# Altium PCB Mid.PcbDoc
Units mm, origin at the board's own origin, x right, y up, seen from the top; angles counter-clockwise.
Board outline 37.6 x 34.04 mm, 2 copper layers (Top Layer, Bottom Layer); 26 components, 26 nets, 103 pads, 18 vias.
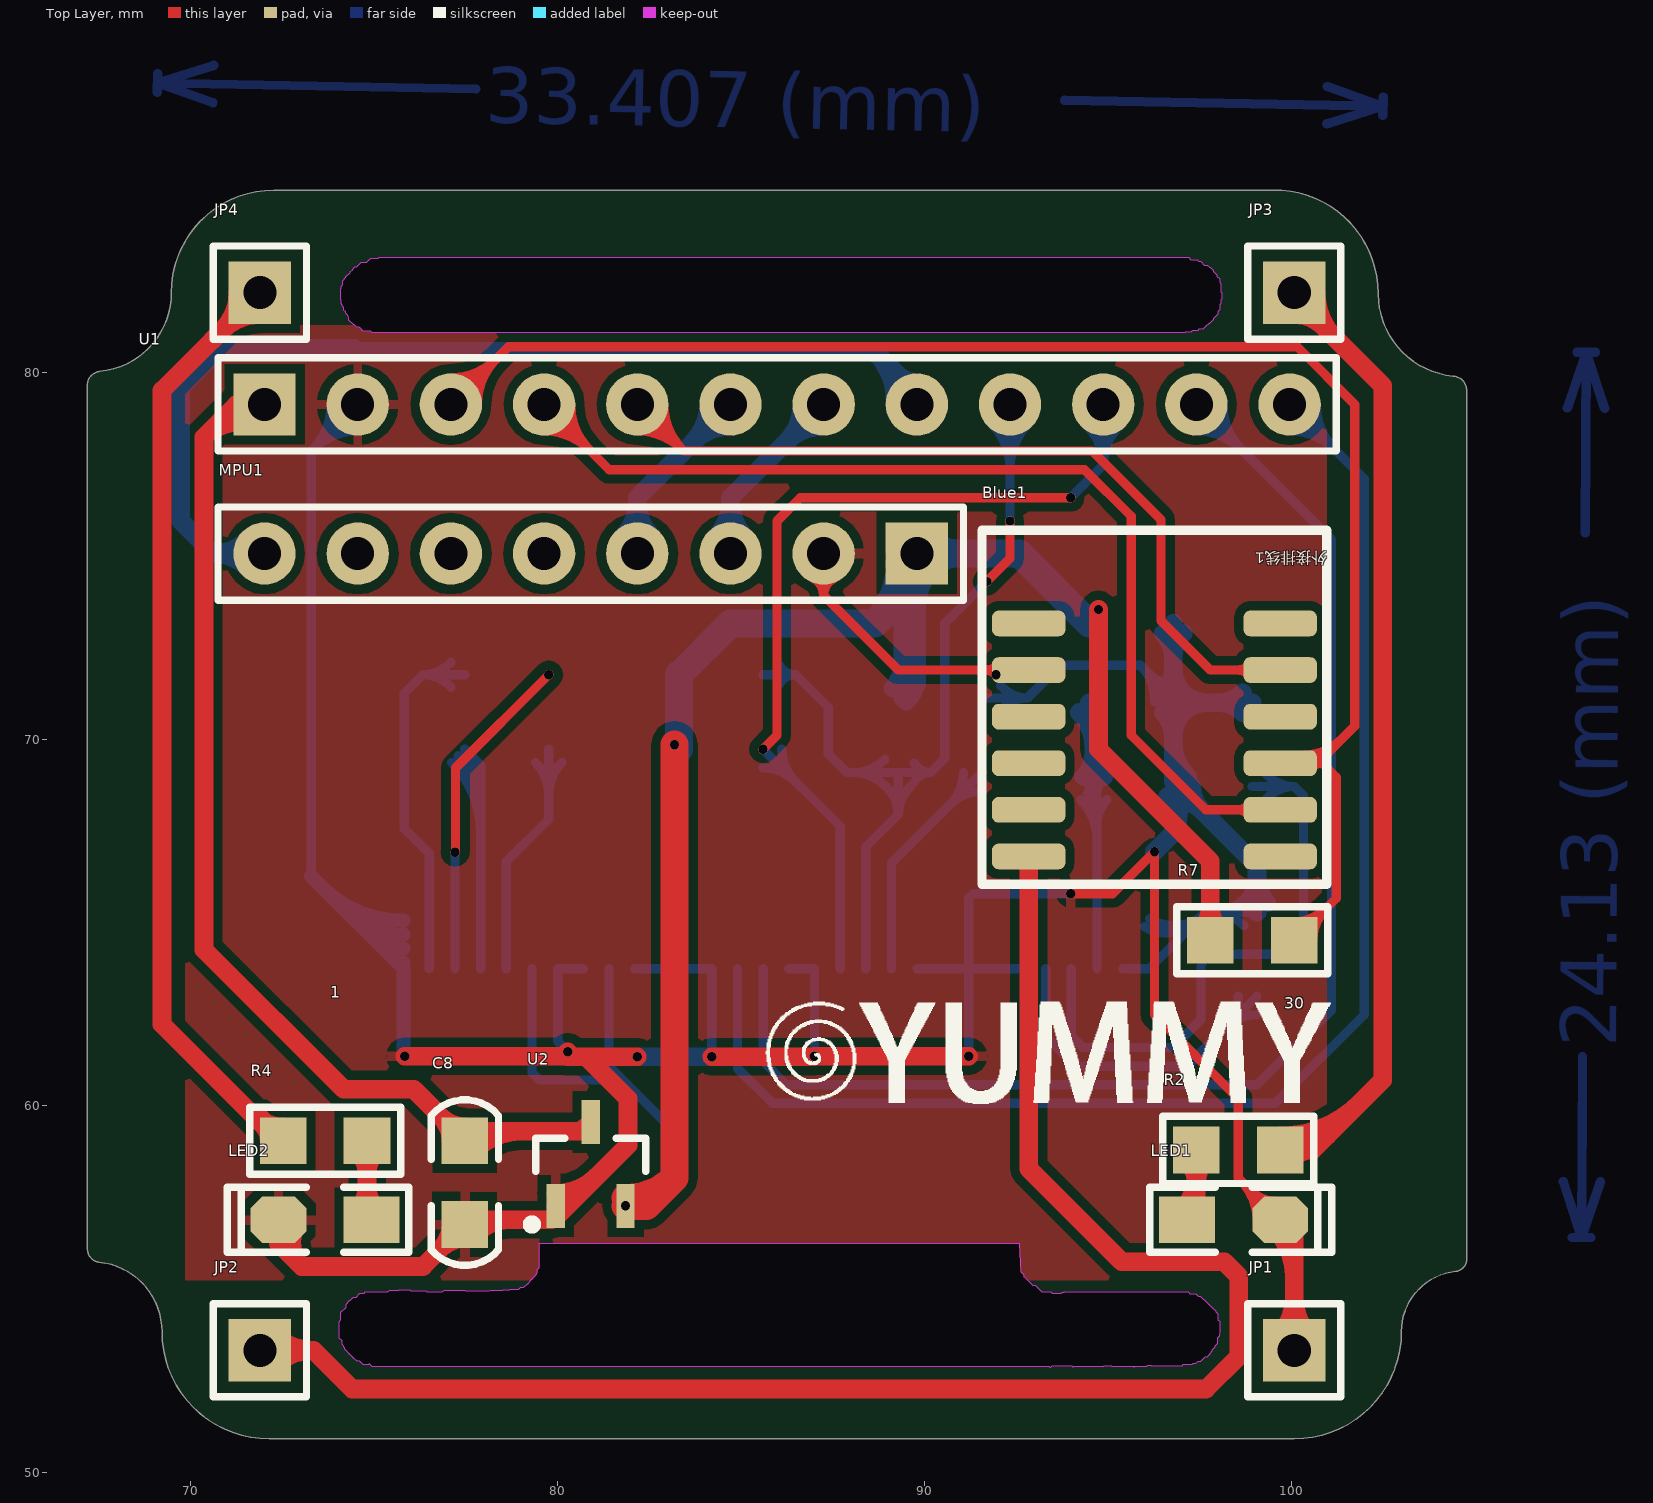
[diagram p0: Top Layer view]
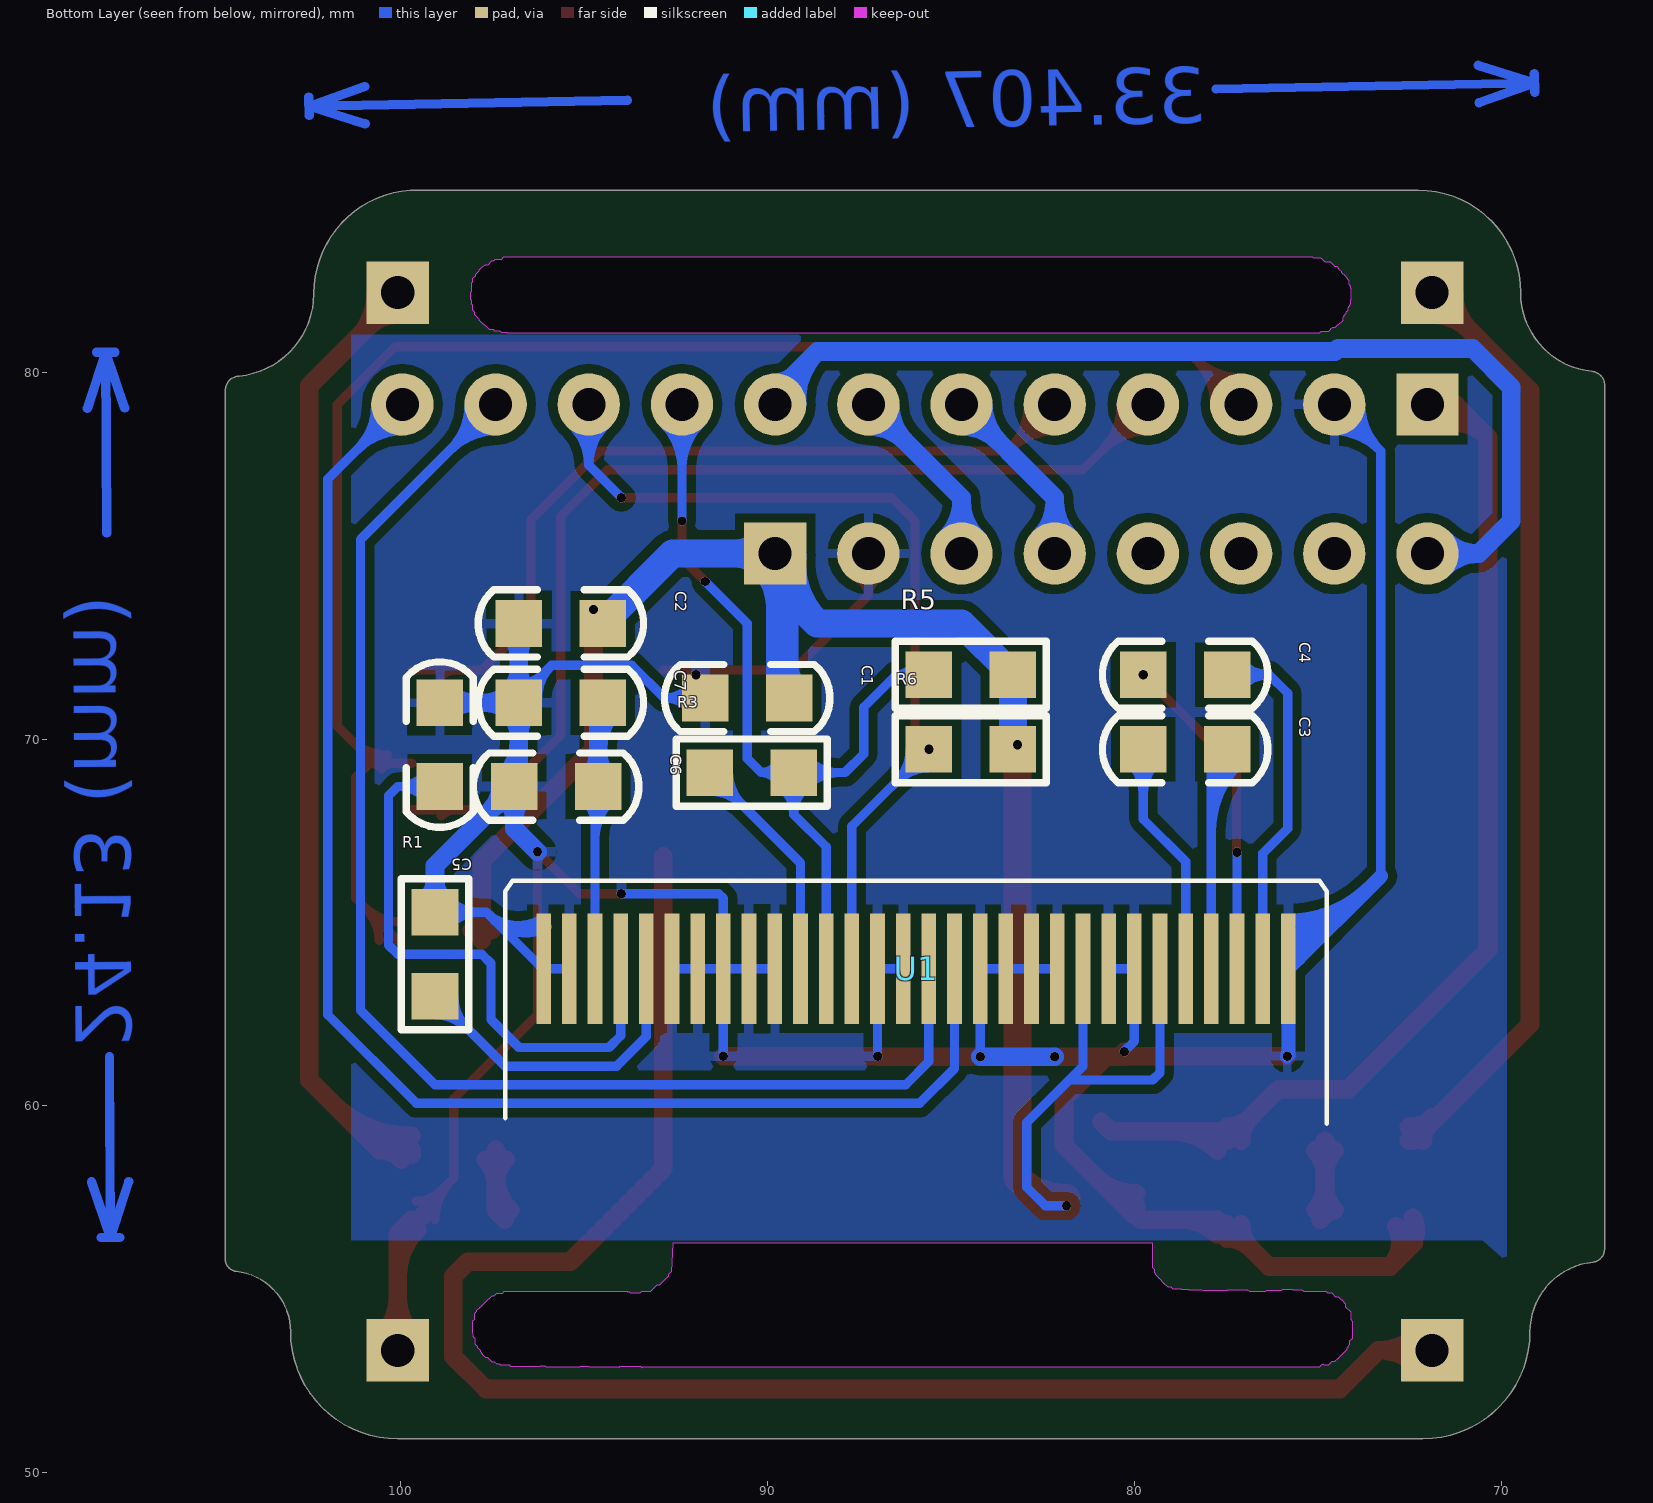
[diagram p1: Bottom Layer view, seen from below]

## Layer stack, top to bottom
Top Solder: solder mask 0.0102, Solder Resist, Dk 3.5
Top Layer: signal copper 0.0356
Dielectric 1: dielectric 0.32, FR-4, Dk 4.8
Bottom Layer: signal copper 0.0356
Bottom Solder: solder mask 0.0102, Solder Resist, Dk 3.5

## Board outline
69.215,53.848 cw(c69.342,53.848) 69.215,53.849 ccw(c67.31,53.848) 67.498,55.743 cw(c67.509,55.87) 67.492,55.744 cw(c67.541,56.102) 67.183,56.142 67.183,79.624 cw(c67.555,79.649) 67.523,80.021 ccw(c67.31,82.169) 69.469,82.169 cw(c72.263,82.169) 72.263,84.963 99.695,84.963 cw(c99.695,84.836) 99.734,84.957 cw(c99.547,82.148) 102.362,82.148 cw(c99.547,82.148) 102.362,82.127 ccw(c104.627,82.148) 104.4,79.895 cw(c104.388,79.507) 104.775,79.507 cw(c104.388,79.507) 104.775,79.501 cw(c104.388,79.507) 104.775,79.5 104.775,79.502 104.775,55.891 cw(c104.43,55.836) 104.78,55.836 cw(c104.43,55.836) 104.499,55.493 cw(c104.474,55.617) 104.484,55.49 cw(c104.648,53.848) 104.486,55.491 104.484,55.49 ccw(c104.648,53.848) 102.997,53.848 cw(c100.076,53.848) 100.076,50.927 72.136,50.927 cw(c72.136,51.054) 72.134,50.927 ccw(c72.136,53.848) 72.136,50.927 72.134,50.927 cw(c72.136,53.848)
cut-out: 79.502,56.261 92.583,56.261 92.617,55.484 92.701,55.4 92.701,55.35 92.721,55.35 92.951,55.12 93.011,55.12 93.191,54.94 93.441,54.94 93.481,54.9 93.731,54.9 93.751,54.92 93.801,54.92 93.811,54.93 97.181,54.93 97.231,54.88 97.391,54.88 97.461,54.81 97.511,54.81 97.591,54.73 97.611,54.73 97.841,54.5 97.861,54.5 97.861,54.49 97.931,54.42 97.931,54.39 97.991,54.33 97.991,54.18 98.041,54.13 98.041,53.95 98.051,53.94 98.051,53.8 98.031,53.78 98.031,53.72 97.981,53.67 97.981,53.52 97.911,53.45 97.911,53.42 97.831,53.34 97.831,53.31 97.771,53.25 97.771,53.23 97.691,53.15 97.631,53.15 97.511,53.03 97.441,53.03 97.381,52.97 97.311,52.97 97.281,52.94 97.041,52.94 97.011,52.91 96.191,52.91 96.181,52.92 96.071,52.92 96.041,52.89 95.731,52.89 95.721,52.88 95.711,52.89 95.111,52.89 95.101,52.9 94.881,52.9 94.871,52.89 94.051,52.89 94.041,52.88 94.021,52.9 93.461,52.9 93.431,52.87 93.411,52.89 74.941,52.89 74.861,52.97 74.841,52.95 74.701,52.95 74.611,53.04 74.531,53.04 74.441,53.13 74.421,53.13 74.421,53.14 74.331,53.23 74.321,53.23 74.321,53.24 74.191,53.37 74.191,53.41 74.171,53.43 74.171,53.45 74.121,53.5 74.121,53.6 74.051,53.67 74.051,53.82 74.041,53.83 74.041,54.12 74.091,54.17 74.091,54.38 74.231,54.52 74.231,54.6 74.321,54.69 74.321,54.71 74.351,54.71 74.431,54.79 74.511,54.79 74.611,54.89 74.721,54.89 74.761,54.93 75.371,54.93 75.421,54.98 75.671,54.98 75.681,54.99 75.971,54.99 76.001,54.96 76.401,54.96 76.431,54.93 76.851,54.93 76.901,54.98 77.461,54.98 77.481,54.96 78.141,54.96 78.161,54.98 78.501,54.98 78.511,54.99 78.691,54.99 78.711,55.01 78.941,55.01 78.991,55.06 79.081,55.06 79.181,55.16 79.191,55.16 79.191,55.17 79.311,55.29 79.321,55.29 79.321,55.31 79.411,55.4 79.411,55.43 79.441,55.46 79.441,55.53 79.501,55.59 79.501,55.66
cut-out: 74.139,82.492 74.229,82.582 74.229,82.612 74.239,82.612 74.339,82.712 74.349,82.712 74.349,82.732 74.409,82.792 74.409,82.812 74.469,82.872 74.519,82.872 74.649,83.002 74.799,83.002 74.899,83.102 75.109,83.102 75.139,83.132 97.199,83.132 97.259,83.072 97.429,83.072 97.479,83.022 97.529,83.022 97.629,82.922 97.709,82.922 97.769,82.862 97.789,82.862 97.869,82.782 97.869,82.752 97.959,82.662 97.959,82.622 98.039,82.542 98.039,82.452 98.069,82.422 98.069,82.292 98.079,82.282 98.079,82.192 98.099,82.172 98.099,81.992 98.079,81.972 98.079,81.872 98.049,81.842 98.049,81.702 97.989,81.642 97.989,81.582 97.869,81.462 97.869,81.432 97.759,81.322 97.739,81.322 97.669,81.252 97.659,81.252 97.579,81.172 97.479,81.172 97.439,81.132 97.289,81.132 97.249,81.092 97.109,81.092 97.089,81.072 74.949,81.072 74.909,81.112 74.699,81.112 74.639,81.172 74.639,81.182 74.589,81.232 74.519,81.232 74.459,81.292 74.439,81.292 74.309,81.422 74.309,81.502 74.289,81.522 74.279,81.522 74.279,81.552 74.219,81.612 74.219,81.642 74.169,81.692 74.169,81.762 74.139,81.792 74.139,81.802 74.129,81.812 74.129,81.832 74.099,81.862 74.099,81.972 74.089,81.982 74.089,82.272 74.099,82.282 74.099,82.342 74.139,82.382

## Design rules (kind name [scope] priority, off if disabled: settings)
Clearance [All] p1: gap=0.254
PolygonConnect [All] p1: connectstyle=Relief reliefconductorwidth=0.254 reliefentries=4 polygonreliefangle="90 Angle" airgapwidth=0.254
RoutingVias [All] p1: holewidth=0.711 width=1.27 viastyle="Through Hole" minholewidth=0.711 minwidth=1.27 maxholewidth=0.711 maxwidth=1.27
SolderMaskExpansion [All] p1: expansion=0.102
Width [All] p1: maxlimit=2.54 minlimit=0.254 preferedwidth=1.27
29 further rules are at their usual default settings.

## Classes and differential pairs
component class Sheet1: Blue1 C1 C2 C3 C4 C5 C6 JP1 JP2 JP3 JP4 LED1 LED2 MPU1 R1 R2 R4 R5 R6 U1 U2 外接排线1

## Components (designator, comment, footprint, x,y, rotation, side; value= is the part's Value field where it differs from the comment)
Blue1 "蓝牙5.0模块" PW02 92.837,71.882 r0 top
C1 "105" "C 0805" 90.551,71.12 r180 bottom
C2 "225" "C 0805" 95.631,73.152 r180 bottom
C3 "105" "C 0805" 78.613,69.723 r180 bottom
C4 "105" "C 0805" 78.613,71.755 r180 bottom
C5 "225" "C 0805" 98.933,69.85 r270 bottom
C6 "225" "C 0805" 95.758,68.707 r180 bottom
C7 "105" "C 0805" 95.631,70.993 r180 bottom
C8 "105" "C 0805" 77.47,57.912 r270 top
JP1 "HDR-1X1" HDR-1X1 100.076,53.34 r0 top
JP2 "HDR-1X1" HDR-1X1 71.882,53.34 r0 top
JP3 "HDR-1X1" HDR-1X1 100.076,82.169 r0 top
JP4 "HDR-1X1" HDR-1X1 71.882,82.169 r0 top
LED1 "红色" "LED 0805B" 98.425,56.896 r0 top
LED2 "红色" "LED 0805G" 73.66,56.896 r180 top
MPU1 "HDR-1X8" HDR-1X8 89.789,75.057 r180 top
R1 "560K" "R 0805" 99.06,64.135 r270 bottom
R2 "1K" "R 0805" 98.552,58.801 r0 top
R3 "0R" "R 0805" 90.424,69.088 r0 bottom
R4 "1K" "R 0805" 73.66,59.055 r180 top
R5 "4.7K" "R 0805" 84.455,71.755 r180 bottom
R6 "4.7K" "R 0805" 84.455,69.723 r180 bottom
R7 "10K" "R 0805" 98.933,64.516 r180 top
U1 "1.3寸OLED，PFC线30pin" 1.3寸OLED-PFC 85.852,61.087 r0 top
U2 "XC6206" SOT23-3N 80.899,58.42 r0 top
外接排线1 "HDR-1X12" HDR-1X12 72.009,79.121 r0 top

## Footprints (in the part's own frame and the unit in brackets; to place one, negate y for a bottom-side part, rotate by r counter-clockwise, add the part's x,y. Pads: shape width x height; smd on the part's side, far side on the other; paste and mask are expansions set on the pad)
1.3寸OLED-PFC [mm] "用于OLED的30针脚"
  rect 0.4x3 smd far side: 1(-10.052,2.654) 2(-9.352,2.654) 3(-8.652,2.654) 4(-7.952,2.654) 5(-7.252,2.654) 6(-6.552,2.654) 7(-5.852,2.654) 8(-5.152,2.654) 9(-4.452,2.654) 10(-3.752,2.654) 11(-3.052,2.654) 12(-2.352,2.654) 13(-1.652,2.654) 14(-0.952,2.654) 15(-0.252,2.654) 16(0.448,2.654) 17(1.148,2.654) 18(1.848,2.654) 19(2.548,2.654) 20(3.248,2.654) 21(3.948,2.654) 22(4.648,2.654) 23(5.348,2.654) 24(6.048,2.654) 25(6.748,2.654) 26(7.448,2.654) 27(8.148,2.654) 28(8.848,2.654) 29(9.548,2.654) 30(10.248,2.654)
  body extent -17.4,-4.95 17.6,18.91, height 2.44
"C 0805" [mil] "无极性贴片电容"
  rect 50x50 smd: 1(-45,0) 2(45,0)
  silkscreen extent -89,-36 89,36, body extent -39,-24 39,24, height 20
HDR-1X1 [mm] "排针，1脚"
  rect 1.7x1.7 hole 0.9: 1(0,0)
  silkscreen extent -1.27,-1.27 1.27,1.27, body extent -1.27,-1.27 1.27,1.27, height 8.5
HDR-1X8 [mm] "排针，8脚"
  rect 1.7x1.7 hole 0.9: 1(0,0)
  round 1.7 hole 0.9: 2(2.54,0) 3(5.08,0) 4(7.62,0) 5(10.16,0) 6(12.7,0) 7(15.24,0) 8(17.78,0)
  silkscreen extent -1.27,-1.27 19.05,1.27, body extent -1.27,-1.27 19.05,1.27, height 8.5
HDR-1X12 [mm] "排针，13脚"
  rect 1.7x1.7 hole 0.9: 1(0,0)
  round 1.7 hole 0.9: 2(2.54,0) 3(5.08,0) 4(7.62,0) 5(10.16,0) 6(12.7,0) 7(15.24,0) 8(17.78,0) 9(20.32,0) 10(22.86,0) 11(25.4,0) 12(27.94,0)
  silkscreen extent -1.27,-1.27 29.21,1.27, body extent -1.27,-1.27 29.21,1.27, height 8.5
"LED 0805B" [mil] "蓝色0805LED"
  rect 60x50 smd: 1(-50,0)
  oct 60x50 smd: 2(50,0)
  silkscreen extent -90,-35 105,35, body extent -39,-25 39,25, height 32
"LED 0805G" [mil] "绿色0805LED"
  rect 60x50 smd: 1(-50,0)
  oct 60x50 smd: 2(50,0)
  silkscreen extent -90,-35 105,35, body extent -39,-25 39,25, height 32
PW02 [mm] "蓝牙5.0模块"
  rrect50% 2x0.7 / inner round 0 / far side round 0 all layers, no hole: 1(0,1.27) 2(0,0) 3(0,-1.27) 4(0,-2.54) 5(0,-3.81) 6(0,-5.08) 7(6.858,-5.08) 8(6.858,-3.81) 9(6.858,-2.54) 10(6.858,-1.27) 11(6.858,0) 12(6.858,1.27)
  silkscreen extent -1.27,-5.84 8.13,3.81
"R 0805" [mil] "1/8W贴片电阻"
  rect 50x50 smd: 1(-45,0) 2(45,0)
  silkscreen extent -81,-36 81,36, body extent -39,-25 39,25, height 20
SOT23-3N [mm] "3x1.3x1mm(长宽高)"
  rect 0.5x1.2 smd: 1(-0.95,-1.143) 2(0.95,-1.143) 3(0,1.143)
  silkscreen extent -1.72,-1.78 1.5,0.7, body extent -1.5,-1.2 1.5,1.2, height 1.05

## Part data
Blue1: library part PW02
C1 C2 C3 C4 C5 C6 C7 C8: library part C, "无极性贴片电容"
JP1 JP2 JP3 JP4: library part "Header 1", "1P接插件"
LED1 LED2: library part LED-SMD, "贴片LED"
MPU1: library part "Header 8", "8P接插件"
R1 R2 R3 R4 R5 R6 R7: library part R, "贴片电阻"
U2: "稳压芯片"
外接排线1: library part "Header 12", "12P接插件"

## Via types
v1: diameter 0.254, hole 0.254, Top Layer to Bottom Layer, 18 vias

## Nets (pads, with @x,y where several pads share a name; then routed paths per layer and width w, separated by ;. In a path a pad name is that pad's centre, name@x,y a point inside that pad or via, vN(x,y) a via of type N, cw(c..) or ccw(c..) an arc to the next point about the centre after c; other vN are vias at no path point)
3V3: Blue1.6 JP2.1 | length 47.4
  Top Layer w0.508: JP2.1 73.346,53.34 74.401,52.285 97.671,52.285 98.559,53.173 98.559,55.361 98.167,55.753 95.377,55.753 92.837,58.293 Blue1.6 ; JP2.1@72.303,52.919 cw(c73.321,51.901) 73.321,53.34 cw(c73.321,54.779) JP2.1@72.303,53.761
+3.3V: C1.2 C2.2 MPU1.1 R5.2 R6.2 R7.2 U1.6 U1.9 U2.2 | length 73.9
  Top Layer w0.508: v1(94.742,73.533) 94.742,69.723 97.79,66.675 R7.2 ; R7.2@97.521,64.785 ccw(c96.87,65.436) 97.79,65.436 ccw(c98.71,65.436) R7.2@98.059,64.785
  Top Layer w0.762: U2.2@81.847,57.496 ccw(c81.874,59.35) 83.185,58.039 ; v1(81.849,57.277) 82.423,57.277 83.185,58.039 ; v1(83.185,69.85) 83.185,58.039
  Bottom Layer w0.254: U1.6 79.3,60.908 79.502,60.706 81.774,60.706 ; U1.9 81.4,61.08 81.774,60.706 ; v1(81.849,57.277) 82.423,57.277 82.931,57.785 82.931,59.549 81.774,60.706
  Bottom Layer w0.508: MPU1.1@89.368,74.636 cw(c88.35,73.618) 89.789,73.618 cw(c91.228,73.618) MPU1.1@90.21,74.636 ; C1.2 89.408,73.914 89.408,74.676 MPU1.1 C1.2@89.789,71.501 ; 89.408,73.852 cw(c90.043,73.852) MPU1.1@89.912,74.474 ; C1.2@89.498,71.03 ccw(c88.795,71.733) C1.2@89.789,71.733 ; C1.2@89.677,71.389 cw(c90.328,72.04) 89.408,72.04 cw(c88.488,72.04) 89.139,71.389 ccw(c87.568,72.96) 89.789,72.96
  Bottom Layer w0.762: R6.2 R5.2 84.709,73.152 88.646,73.152 ; MPU1.1@89.322,75.015 cw(c86.992,74.806) 88.646,73.152 ; MPU1.1@89.436,74.748 cw(c88.976,74.346) 89.408,73.914 88.646,73.152 ; MPU1.1 92.583,75.057 C2.2 ; MPU1.1@90.121,74.725 cw(c90.921,73.925) 90.921,75.057 cw(c90.921,76.189) MPU1.1@90.121,75.389
GND: Blue1.2 C1.1 C2.1 C5.1 C6.1 C7.1 C8.2 JP1.1 LED1.2 LED2.2 MPU1.2 R1.1 U1.1 U1.7 U1.8 U1.10 U1.11 U1.12 U1.13 U1.16 U1.17 U1.21 U1.22 U1.23 U1.24 U1.25 U1.29 U1.30 U2.1 外接排线1.2 | length 166
  Top Layer w0.254: MPU1.2@86.939,74.404 cw(c86.707,73.914) 87.249,73.914 ; MPU1.2 87.249,73.914 ; MPU1.2@87.559,74.404 ccw(c87.791,73.914) 87.249,73.914 ; 91.641,71.882 cw(c91.641,71.448) v1(91.948,71.755) cw(c92.255,71.448) Blue1.2@92.255,71.882 ; Blue1.2@92.029,71.724 ccw(c91.649,71.344) 91.649,71.882 ccw(c91.649,72.42) Blue1.2@92.029,72.04 ; Blue1.2 89.281,71.882 87.249,73.914 ; v1(93.98,65.786) 95.123,65.786 v1(96.266,66.929) 96.266,62.484 98.552,60.198 98.552,58.039 LED1.2 ; 98.611,57.98 cw(c97.527,56.896) LED1.2@99.06,56.896 ; 98.918,57.673 ccw(c99.568,58.324) LED1.2@99.568,57.404 ; 99.045,57.546 cw(c98.394,56.896) LED1.2@99.314,56.896
  Top Layer w0.508: LED2.2 72.39,56.261 73.025,55.626 ; LED2.2@72.404,56.954 ccw(c73.041,56.624) 72.534,56.117 ; LED2.2@72.855,56.721 ccw(c73.688,56.289) 73.025,55.626 ; v1(75.833,61.355) 80.151,61.355 v1(80.278,61.482) ; C8.2@77.089,56.769 cw(c76.169,56.769) 76.82,56.119 cw(c77.47,55.468) C8.2@77.47,56.388 ; C8.2 76.327,55.626 73.025,55.626 ; C8.2@77.724,56.896 79.822,56.896 79.949,57.023 80.01,57.023 80.264,57.277 ; C8.2@77.739,56.5 cw(c78.696,55.543) 78.696,56.896 ; U2.1@79.949,57.115 ccw(c79.949,57.484) 80.21,57.223 ; U2.1 80.264,57.277 ; U2.1@79.949,57.623 ccw(c79.949,59.219) 81.077,58.09 ; 80.419,61.341 80.772,61.341 ; v1(82.169,61.341) 80.772,61.341 ; v1(84.201,61.341) 86.981,61.341 v1(86.995,61.355) v1(91.2,61.355) ; LED1.2@99.553,56.627 cw(c98.289,55.363) 100.076,55.363 ; JP1.1@99.655,53.761 ccw(c98.637,54.779) 100.076,54.779 ccw(c101.515,54.779) JP1.1@100.497,53.761 ; LED1.2 100.076,56.515 JP1.1 ; 80.264,57.277 81.915,58.928 81.915,60.198 80.772,61.341 ; 80.188,61.392 ccw(c80.312,61.516) 80.312,61.341 cw(c80.312,61.516) 80.188,61.392
  Bottom Layer w0.254: 73.279,66.262 73.279,77.851 外接排线1.2 ; 外接排线1.2@73.826,79.121 cw(c72.081,79.121) 73.315,77.887 cw(c74.549,76.653) 外接排线1.2@74.549,78.398 ; 外接排线1.2@74.08,79.121 cw(c72.948,79.121) 73.748,78.32 cw(c74.549,77.52) 外接排线1.2@74.549,78.652 ; v1(80.278,61.482) 80,61.76 U1.7 U1.8 ; U1.10 U1.11 U1.12 U1.13 v1(84.201,61.341) v1(84.201,61.341) ; U1.16 U1.17 87,61.36 v1(86.995,61.355) ; U1.21 U1.22 U1.23 ; v1(91.2,61.355) U1.23 ; C1.1 92.806,71.12 ; C1.1@92.078,70.787 cw(c92.806,70.157) 92.806,71.12 ; C1.1@92.078,71.453 ccw(c92.806,72.083) 92.806,71.12 ; U1.25 U1.24 U1.23 ; v1(93.98,65.786) 91.327,65.786 91.2,65.659 U1.23 ; U1.29 U1.30 96.126,63.741 97.663,65.278 ; U1.30@96.004,64.887 ccw(c96.617,65.872) 97.437,65.052 ; 96.124,71.77 ccw(c96.774,72.421) C7.1@96.774,71.501 ; U1.30@96.139,65.103 ccw(c96.791,66.15) 97.663,65.278 ; C7.1@96.267,71.018 ccw(c94.96,71.084) 95.885,72.009 ; C7.1@96.29,71.604 cw(c95.731,71.045) C7.1@96.52,71.006 ; C7.1 96.774,71.12 95.885,72.009 ; R1.1@98.701,64.919 ccw(c97.834,64.052) 97.834,65.278 ccw(c97.834,66.504) R1.1@98.701,65.637 ; R1.1 97.663,65.278 ; 92.806,71.12 93.695,72.009 95.885,72.009
  Bottom Layer w0.381: 73.279,66.262 U1.1 75.8,61.388 v1(75.833,61.355) ; 73.565,65.976 ccw(c75.8,68.212) U1.1@75.8,65.05 ; 74.215,65.326 ccw(c75.8,66.911) U1.1@75.8,64.669 ; 74.865,64.676 ccw(c75.8,65.61) U1.1@75.8,64.288 ; 75.516,64.025 ccw(c75.8,64.309) U1.1@75.8,63.907
  Bottom Layer w0.508: v1(82.169,61.341) v1(84.201,61.341) ; v1(96.266,66.929) 96.901,67.564 C6.1 ; C7.1@96.505,70.724 cw(c95.854,70.073) 96.774,70.073 cw(c97.694,70.073) 97.043,70.724 cw(c97.694,70.073) 97.694,70.993 cw(c97.694,71.913) 97.043,71.262 cw(c97.694,71.913) 96.774,71.913 cw(c95.854,71.913) C7.1@96.505,71.262 ; C2.1@96.505,72.883 cw(c95.854,72.232) 96.774,72.232 cw(c97.694,72.232) C2.1@97.043,72.883 ; C6.1@96.632,68.438 cw(c95.981,67.787) 96.901,67.787 cw(c97.821,67.787) C6.1@97.17,68.438 ; 96.774,69.933 ccw(c98.127,69.933) C6.1@97.17,68.976 ; C7.1@96.774,71.12 C2.1 ; C6.1@96.901,68.326 cw(c96.901,67.406) 97.551,68.057 cw(c98.202,68.707) C6.1@97.282,68.707 ; C5.1@98.664,70.724 ccw(c98.013,70.073) 98.013,70.993 ccw(c98.013,71.913) C5.1@98.664,71.262 ; R1.1@98.791,65.547 ccw(c98.14,66.198) 99.06,66.198 ccw(c99.98,66.198) R1.1@99.329,65.547 ; C5.1 C7.1 96.774,68.834 C6.1 ; R1.1 99.06,66.548 C6.1
IIC_SCL: MPU1.3 外接排线1.7 | length 9.6
  Bottom Layer w0.508: MPU1.3@84.288,75.478 ccw(c83.27,76.496) 84.709,76.496 ccw(c86.148,76.496) MPU1.3@85.13,75.478 ; MPU1.3 84.709,76.581 外接排线1.7 ; 外接排线1.7@86.653,79.121 cw(c85.214,79.121) 86.232,78.104 cw(c87.249,77.086) 外接排线1.7@87.249,78.525
IIC_SDA: MPU1.4 外接排线1.6 | length 9.6
  Bottom Layer w0.508: MPU1.4@81.748,75.478 ccw(c80.73,76.496) 82.169,76.496 ccw(c83.608,76.496) MPU1.4@82.59,75.478 ; MPU1.4 82.169,76.581 外接排线1.6 ; 外接排线1.6@84.113,79.121 cw(c82.674,79.121) 83.692,78.104 cw(c84.709,77.086) 外接排线1.6@84.709,78.525
MPU_INT: MPU1.8 外接排线1.8 | length 31.9
  Bottom Layer w0.508: MPU1.8@71.579,74.645 ccw(c70.612,73.718) 70.612,75.057 ; MPU1.8@71.579,75.469 cw(c70.612,76.396) 70.612,75.057 ; MPU1.8 70.612,75.057 ; 外接排线1.8@89.194,79.149 ccw(c87.319,79.237) 88.646,80.564 ; 89.284,79.926 ccw(c89.789,80.432) 外接排线1.8@89.789,79.717 ; 外接排线1.8 89.789,79.421 88.646,80.564 ; 70.612,75.057 69.723,75.946 69.723,79.59 70.778,80.645 74.448,80.645 74.529,80.564 88.646,80.564
NetC3_1: C3.1 U1.5 | length 8.4
  Bottom Layer w0.254: U1.5 78.6,66.662 79.756,67.818 C3.1 ; C3.1@79.397,69.364 cw(c78.53,68.497) 79.756,68.497 cw(c80.982,68.497) C3.1@80.115,69.364
NetC3_2: C3.2 U1.4 | length 11.1
  Bottom Layer w0.254: C3.2@77.111,69.364 cw(c75.205,67.458) 77.9,67.458 ; C3.2@77.29,69.543 cw(c75.819,68.072) 77.9,68.072 ; U1.4 77.9,69.293 C3.2 cw(c76.432,68.685) 77.9,68.685
NetC4_1: C4.1 U1.3 | length 9.1
  Top Layer w0.254: v1@77.216,66.929 77.216,69.215 v1(79.756,71.755)
  Bottom Layer w0.254: U1.3 v1(77.2,66.913)
NetC4_2: C4.2 U1.2 | length 11.4
  Bottom Layer w0.254: U1.2 76.5,66.883 75.819,67.564 75.819,71.247 76.327,71.755 ; C4.2@77.093,71.415 ccw(c76.327,70.723) 76.327,71.755 ; C4.2@77.093,72.095 cw(c76.327,72.787) 76.327,71.755 ; C4.2 76.327,71.755
NetC5_2: C5.2 U1.27 | length 17.6
  Bottom Layer w0.254: U1.27 94,61.912 94.317,61.595 96.774,61.595 97.536,62.357 97.536,63.881 97.79,64.135 100.076,64.135 100.33,64.389 100.33,68.453 100.076,68.707 ; C5.2 100.076,68.707 ; C5.2@99.31,68.367 cw(c100.076,67.675) 100.076,68.707 ; C5.2@99.31,69.047 ccw(c100.076,69.739) 100.076,68.707
NetC6_2: C6.2 C7.2 U1.28 | length 12.5
  Bottom Layer w0.254: C6.2@94.256,68.348 cw(c93.183,67.275) 94.7,67.275 ; C6.2@94.435,68.527 cw(c93.797,67.889) 94.7,67.889 ; C6.2 94.7,68.622 U1.28 ; 94.7,67.686 cw(c95.636,67.686) C6.2@94.974,68.348
  Bottom Layer w0.508: C7.2@94.219,70.724 cw(c93.262,69.767) 94.615,69.767 ; C6.2@94.346,68.976 ccw(c93.695,69.627) 94.615,69.627 ccw(c95.535,69.627) C6.2@94.884,68.976 ; C7.2 94.615,70.866 C6.2
NetLED1_1: LED1.1 R2.1 | length 4.5
  Top Layer w0.508: LED1.1@97.013,57.165 ccw(c96.056,58.122) 97.409,58.122 ; R2.1@97.14,58.532 cw(c96.489,57.881) 97.409,57.881 cw(c98.329,57.881) R2.1@97.678,58.532 ; LED1.1 97.409,57.15 R2.1
NetLED2_1: LED2.1 R4.1 | length 5.1
  Top Layer w0.508: LED2.1@74.534,57.165 ccw(c73.883,57.816) 74.803,57.816 ccw(c75.723,57.816) LED2.1@75.072,57.165 ; R4.1@74.534,58.786 cw(c73.883,58.135) 74.803,58.135 cw(c75.723,58.135) R4.1@75.072,58.786 ; R4.1 74.803,57.023 LED2.1
NetR1_2: R1.2 U1.26 | length 10.7
  Bottom Layer w0.254: U1.26 93.3,61.894 94.107,61.087 97.155,61.087 R1.2 ; R1.2@98.552,62.992 cw(c97.326,62.992) 98.193,62.125 cw(c99.06,61.258) R1.2@99.06,62.484
NetR3_2: R3.2 U1.20 | length 8.3
  Bottom Layer w0.254: U1.20 89.1,66.621 R3.2 ; R3.2@91.059,69.088 cw(c89.833,69.088) 90.7,68.221 cw(c91.567,67.354) R3.2@91.567,68.58
OLED_DC_PIN: U1.15 外接排线1.11 | length 42.3
  Bottom Layer w0.254: U1.15 85.6,61.212 86.233,60.579 99.06,60.579 101.092,62.611 101.092,75.438 外接排线1.11 外接排线1.11@97.409,78.486 ; 外接排线1.11@97.409,78.398 cw(c97.409,76.653) 98.643,77.887 cw(c99.877,79.121) 外接排线1.11@98.132,79.121 ; 外接排线1.11@97.409,78.652 cw(c97.409,77.52) 98.21,78.32 cw(c99.01,79.121) 外接排线1.11@97.878,79.121
OLED_RST_PIN: U1.14 外接排线1.12 | length 43.2
  Bottom Layer w0.254: U1.14 84.9,61.023 85.852,60.071 99.568,60.071 101.981,62.484 101.981,77.089 外接排线1.12 ; 外接排线1.12@99.949,78.398 cw(c99.949,76.653) 101.183,77.887 cw(c102.417,79.121) 外接排线1.12@100.672,79.121 ; 外接排线1.12@99.949,78.652 cw(c99.949,77.52) 100.75,78.32 cw(c101.55,79.121) 外接排线1.12@100.418,79.121
OLED_SCK_PIN: R6.1 U1.18 外接排线1.10 | length 30.5
  Top Layer w0.254: v1(85.598,69.723) 85.979,70.104 85.979,75.946 86.614,76.581 v1(93.98,76.581)
  Bottom Layer w0.254: R6.1@85.598,69.215 cw(c85.598,67.989) 86.465,68.856 cw(c87.332,69.723) R6.1@86.106,69.723 ; v1(85.598,69.723) 87.7,67.621 U1.18 ; v1(93.98,76.581) 94.869,77.47 ; 外接排线1.10@94.379,78.59 cw(c93.346,77.47) 94.869,77.47 ; 外接排线1.10@94.551,78.776 cw(c93.881,78.05) 94.869,78.05 cw(c95.857,78.05) 外接排线1.10@95.187,78.776 ; 外接排线1.10 94.869,77.47 ; 外接排线1.10@95.359,78.59 ccw(c96.392,77.47) 94.869,77.47
OLED_SDA_PIN: R3.1 R5.1 U1.19 外接排线1.9 | length 33.4
  Top Layer w0.254: v1(91.694,74.295) 92.329,74.93 v1(92.329,75.946)
  Bottom Layer w0.254: R5.1 86.487,71.755 ; R5.1@86.036,71.497 cw(c86.487,71.231) 86.487,71.755 ; R5.1@86.036,72.013 ccw(c86.487,72.279) 86.487,71.755 ; U1.19 88.4,67.064 89.281,67.945 ; R3.1@88.922,68.729 ccw(c88.055,67.862) 88.055,69.088 ccw(c88.055,70.314) R3.1@88.922,69.447 ; R3.1@88.941,68.711 cw(c88.249,67.945) 89.281,67.945 ; R3.1@89.621,68.711 ccw(c90.313,67.945) 89.281,67.945 ; R3.1@89.719,68.83 cw(c90.17,68.564) 90.17,69.088 ; R3.1@89.719,69.346 ccw(c90.17,69.612) 90.17,69.088 ; v1(91.694,74.295) 90.551,73.152 90.551,69.469 90.17,69.088 ; 外接排线1.9@91.818,78.61 cw(c90.584,77.376) 92.329,77.376 cw(c94.074,77.376) 外接排线1.9@92.84,78.61 ; 外接排线1.9@91.997,78.789 cw(c91.197,77.989) 92.329,77.989 cw(c93.461,77.989) 外接排线1.9@92.661,78.789 ; v1(92.329,75.946) 外接排线1.9 ; 86.487,71.755 87.376,70.866 87.376,69.596 87.884,69.088 R3.1 ; 89.281,67.945 R3.1 ; R3.1 90.17,69.088
PA8: Blue1.9 R7.1 外接排线1.3 | length 52.5
  Top Layer w0.254: 外接排线1.3 78.659,80.691 100.157,80.691 101.727,79.121 101.727,70.358 100.711,69.342 ; 外接排线1.3@77.089,79.59 ccw(c77.089,80.722) 77.89,79.922 ccw(c78.69,79.121) 外接排线1.3@77.558,79.121 ; 外接排线1.3@77.089,79.844 ccw(c77.089,81.589) 78.323,80.355 ccw(c79.557,79.121) 外接排线1.3@77.812,79.121 ; Blue1.9 100.711,69.342 ; R7.1 101.219,65.659 101.219,68.961 100.838,69.342 ; R7.1@100.076,65.024 ccw(c100.076,66.25) 100.943,65.383 ccw(c101.81,64.516) R7.1@100.584,64.516 ; Blue1.9@100.345,69.311 ccw(c100.345,70.12) 100.917,69.548 ; Blue1.9@100.345,69.565 ccw(c100.345,70.987) 101.35,69.981 ; Blue1.9@100.512,69.195 cw(c100.838,68.909) 100.838,69.342 ; Blue1.9@100.512,69.489 ccw(c100.838,69.775) 100.838,69.342 ; 100.711,69.342 cw(c100.711,69.531) 100.543,69.444 ccw(c100.711,69.531) 100.711,69.342 ; 100.711,69.342 ccw(c100.711,69.153) 100.543,69.24 cw(c100.711,69.153) 100.711,69.342 ; 100.711,69.342 100.838,69.342
PA9: Blue1.8 外接排线1.4 | length 33.8
  Top Layer w0.254: 外接排线1.4@79.629,78.398 cw(c79.629,76.653) 80.863,77.887 cw(c82.097,79.121) 外接排线1.4@80.352,79.121 ; 外接排线1.4@79.629,78.652 cw(c79.629,77.52) 80.43,78.32 cw(c81.23,79.121) 外接排线1.4@80.098,79.121 ; 外接排线1.4@79.883,79.121 外接排线1.4 81.407,77.343 94.361,77.343 95.631,76.073 95.631,70.104 97.663,68.072 Blue1.8 ; Blue1.8@98.887,67.914 ccw(c98.507,67.534) 98.507,68.072 ccw(c98.507,68.61) Blue1.8@98.887,68.23
PA10: Blue1.11 外接排线1.5 | length 27.5
  Top Layer w0.254: 外接排线1.5@82.169,78.398 cw(c82.169,76.653) 83.403,77.887 cw(c84.637,79.121) 外接排线1.5@82.892,79.121 ; 外接排线1.5@82.169,78.652 cw(c82.169,77.52) 82.97,78.32 cw(c83.77,79.121) 外接排线1.5@82.638,79.121 ; 外接排线1.5 83.439,77.851 94.571,77.851 96.443,75.98 96.443,73.229 97.79,71.882 Blue1.11 ; Blue1.11@98.887,71.724 ccw(c98.507,71.344) 98.507,71.882 ccw(c98.507,72.42) Blue1.11@98.887,72.04
PB12: JP3.1 R2.2 | length 33.5
  Top Layer w0.508: R2.2@99.695,58.674 ccw(c99.695,60.514) 100.996,59.213 ; R2.2 100.584,58.801 ; R2.2@99.695,59.182 ccw(c99.695,62.248) 101.863,60.08 ; R2.2@99.971,58.538 cw(c100.584,57.954) 100.584,58.801 ; R2.2@99.971,59.064 ccw(c100.584,59.648) 100.584,58.801 ; JP3.1@100.076,81.573 cw(c100.076,80.441) 100.877,81.241 ; JP3.1 100.076,82.042 102.489,79.629 102.489,60.706 100.584,58.801 ; JP3.1@100.672,82.169 ccw(c102.417,82.169) 101.183,80.935
PB13: JP4.1 R4.2 | length 30.3
  Top Layer w0.508: JP4.1@71.286,82.169 cw(c69.847,82.169) 70.865,81.152 cw(c71.882,80.134) JP4.1@71.882,81.573 ; 71.65,59.795 ccw(c72.517,60.662) R4.2@72.517,59.436 ; 71.882,59.69 R4.2 72.39,59.055 69.215,62.23 69.215,79.502 JP4.1 ; R4.2@71.956,59.489 cw(c71.523,59.055) R4.2@72.136,59.055
VBATTERY: C8.1 U2.3 外接排线1.1 | length 34.5
  Top Layer w0.508: 70.927,78.801 cw(c71.641,78.086) 外接排线1.1@71.98,79.038 ; 外接排线1.1@71.809,78.559 ccw(c71.343,77.247) 70.358,78.232 ; 外接排线1.1 71.247,79.121 70.358,78.232 ; C8.1@77.089,59.055 ccw(c76.169,59.055) 76.82,59.705 ccw(c77.47,60.356) C8.1@77.47,59.436 ; C8.1@77.739,58.786 cw(c79.003,57.522) 79.003,59.309 ; U2.3 80.645,59.309 77.724,59.309 C8.1 76.073,60.452 74.168,60.452 70.358,64.262 70.358,78.232
pads on no net: Blue1.1 Blue1.3 Blue1.4 Blue1.5 Blue1.7 Blue1.10 Blue1.12 MPU1.5 MPU1.6 MPU1.7
copper on no net: | length 42.1
  Bottom Layer w0.254: 69.088,87.63 69.098,88.138 ; 70.607,87.347 69.093,87.884 ; 70.626,88.363 69.093,87.884 ; 77.771,87.719 69.093,87.884 ; 93.816,87.414 102.494,87.249 ; 100.96,86.77 102.494,87.249 ; 100.98,87.786 102.494,87.249 ; 102.489,86.995 102.499,87.503 ; 107.408,57.942 107.908,56.415 ; 107.519,79.024 108.035,80.545 ; 107.654,56.417 108.162,56.414 ; 107.781,80.547 108.289,80.544 ; 107.934,61.345 107.908,56.415 ; 108.009,75.615 108.035,80.545 ; 108.424,57.937 107.908,56.415 ; 108.535,79.019 108.035,80.545

## Polygon pours and split planes (outlines as drawn)
GND on Top Layer "Bottom Layer-No Net" (solid, pour order 2): 69.85,55.245 69.85,81.28 101.346,81.28 100.965,80.899 100.965,55.245
GND on Bottom Layer "Bottom Layer-No Net" (solid, pour order 4): 69.85,81.026 69.85,55.753 70.498,56.341 101.346,56.341 101.346,81.026

## Other copper
Bottom Layer:
  text "33.407 (mm)" at 78.007,86.8 h1.52 r358.91
  text "24.13 (mm)" at 108.85,61.594 h1.52 r89.7

## Silkscreen, mask and mechanical layers (free items; w line width, h text height)
Top Overlay:
  drawing of 1581 lines, arcs and shapes, not listed
Mechanical 1:
  lines w0.1: 75.099,81.087 cw(c75.099,82.087) 75.099,83.087 ; 79.541,55.862 cw(c78.543,55.93) 78.543,54.93 75.041,54.93 ccw(c75.041,53.93) 75.041,52.93 97.041,52.93 ccw(c97.041,53.93) 97.041,54.93 93.539,54.93 cw(c93.539,55.93) 92.541,55.862 ; 97.099,81.087 ccw(c97.099,82.087) 97.099,83.087
  lines w0.102: 75.099,81.087 97.074,81.087 ; 75.154,83.087 97.099,83.087 ; 79.501,55.66 79.501,56.133 ; 79.502,56.261 92.583,56.261 92.541,56.219 92.541,56.092 92.541,55.862 ; 82.168,56.133 82.168,56.26 82.169,56.261
  lines w0.254: 69.571,59.698 70.104,61.214 ; 69.85,61.218 70.358,61.21 ; 69.875,78.367 70.358,76.835 ; 70.063,58.674 70.104,61.214 ; 70.104,76.839 70.612,76.831 ; 70.399,79.375 70.358,76.835 ; 70.587,59.682 70.104,61.214 ; 70.882,77.224 70.885,76.716 ; 70.891,78.351 70.358,76.835 ; 72.404,77.487 70.883,76.97 ; 72.41,76.471 70.883,76.97 ; 73.527,76.986 70.883,76.97 ; 89.321,77.081 91.965,77.097 ; 90.438,77.595 91.965,77.097 ; 90.444,76.58 91.965,77.097 ; 91.964,77.351 91.967,76.843 ; 99.568,84.836 cw(c99.547,82.148) 102.235,82.127 ccw(c104.627,82.148) 104.393,79.767 cw(c104.388,79.507) 104.648,79.502 104.648,55.88 cw(c104.43,55.836) 104.474,55.617 ccw(c104.648,53.848) 102.87,53.848 cw(c100.076,53.848) 100.076,51.054 72.136,51.054 cw(c72.136,53.848) 69.342,53.848 ccw(c67.31,53.848) 67.509,55.87 cw(c67.541,56.102) 67.31,56.134 67.31,79.629 cw(c67.555,79.649) 67.534,79.894 ccw(c67.31,82.169) 69.596,82.169 cw(c72.263,82.169) 72.263,84.836 99.695,84.836
  text "21.082 (mm)" at 73.787,76.073 h1.52 r0.35
  text "15.623 (mm)" at 73.763,61.323 h1.52 r89.07

## Text inside footprints (layer, text, board x,y; h text height)
U1: Top Overlay "30" at 99.8,62.541 h0.52; Top Overlay "1" at 73.8,62.841 h0.52